# Altium PCB 宁波2号线PIS_数字功率放大器_网络音频(BHC-A-2030-02)_PCB(06001537)_V1.0.PcbDoc (part 2 of 7)
Units mm, origin at the board's own origin, x right, y up, seen from the top; angles counter-clockwise.
Board outline 86 x 96 mm, 4 copper layers (Top Layer, GND, VDD, Bottom Layer); 204 components, 185 nets, 781 pads, 267 vias.
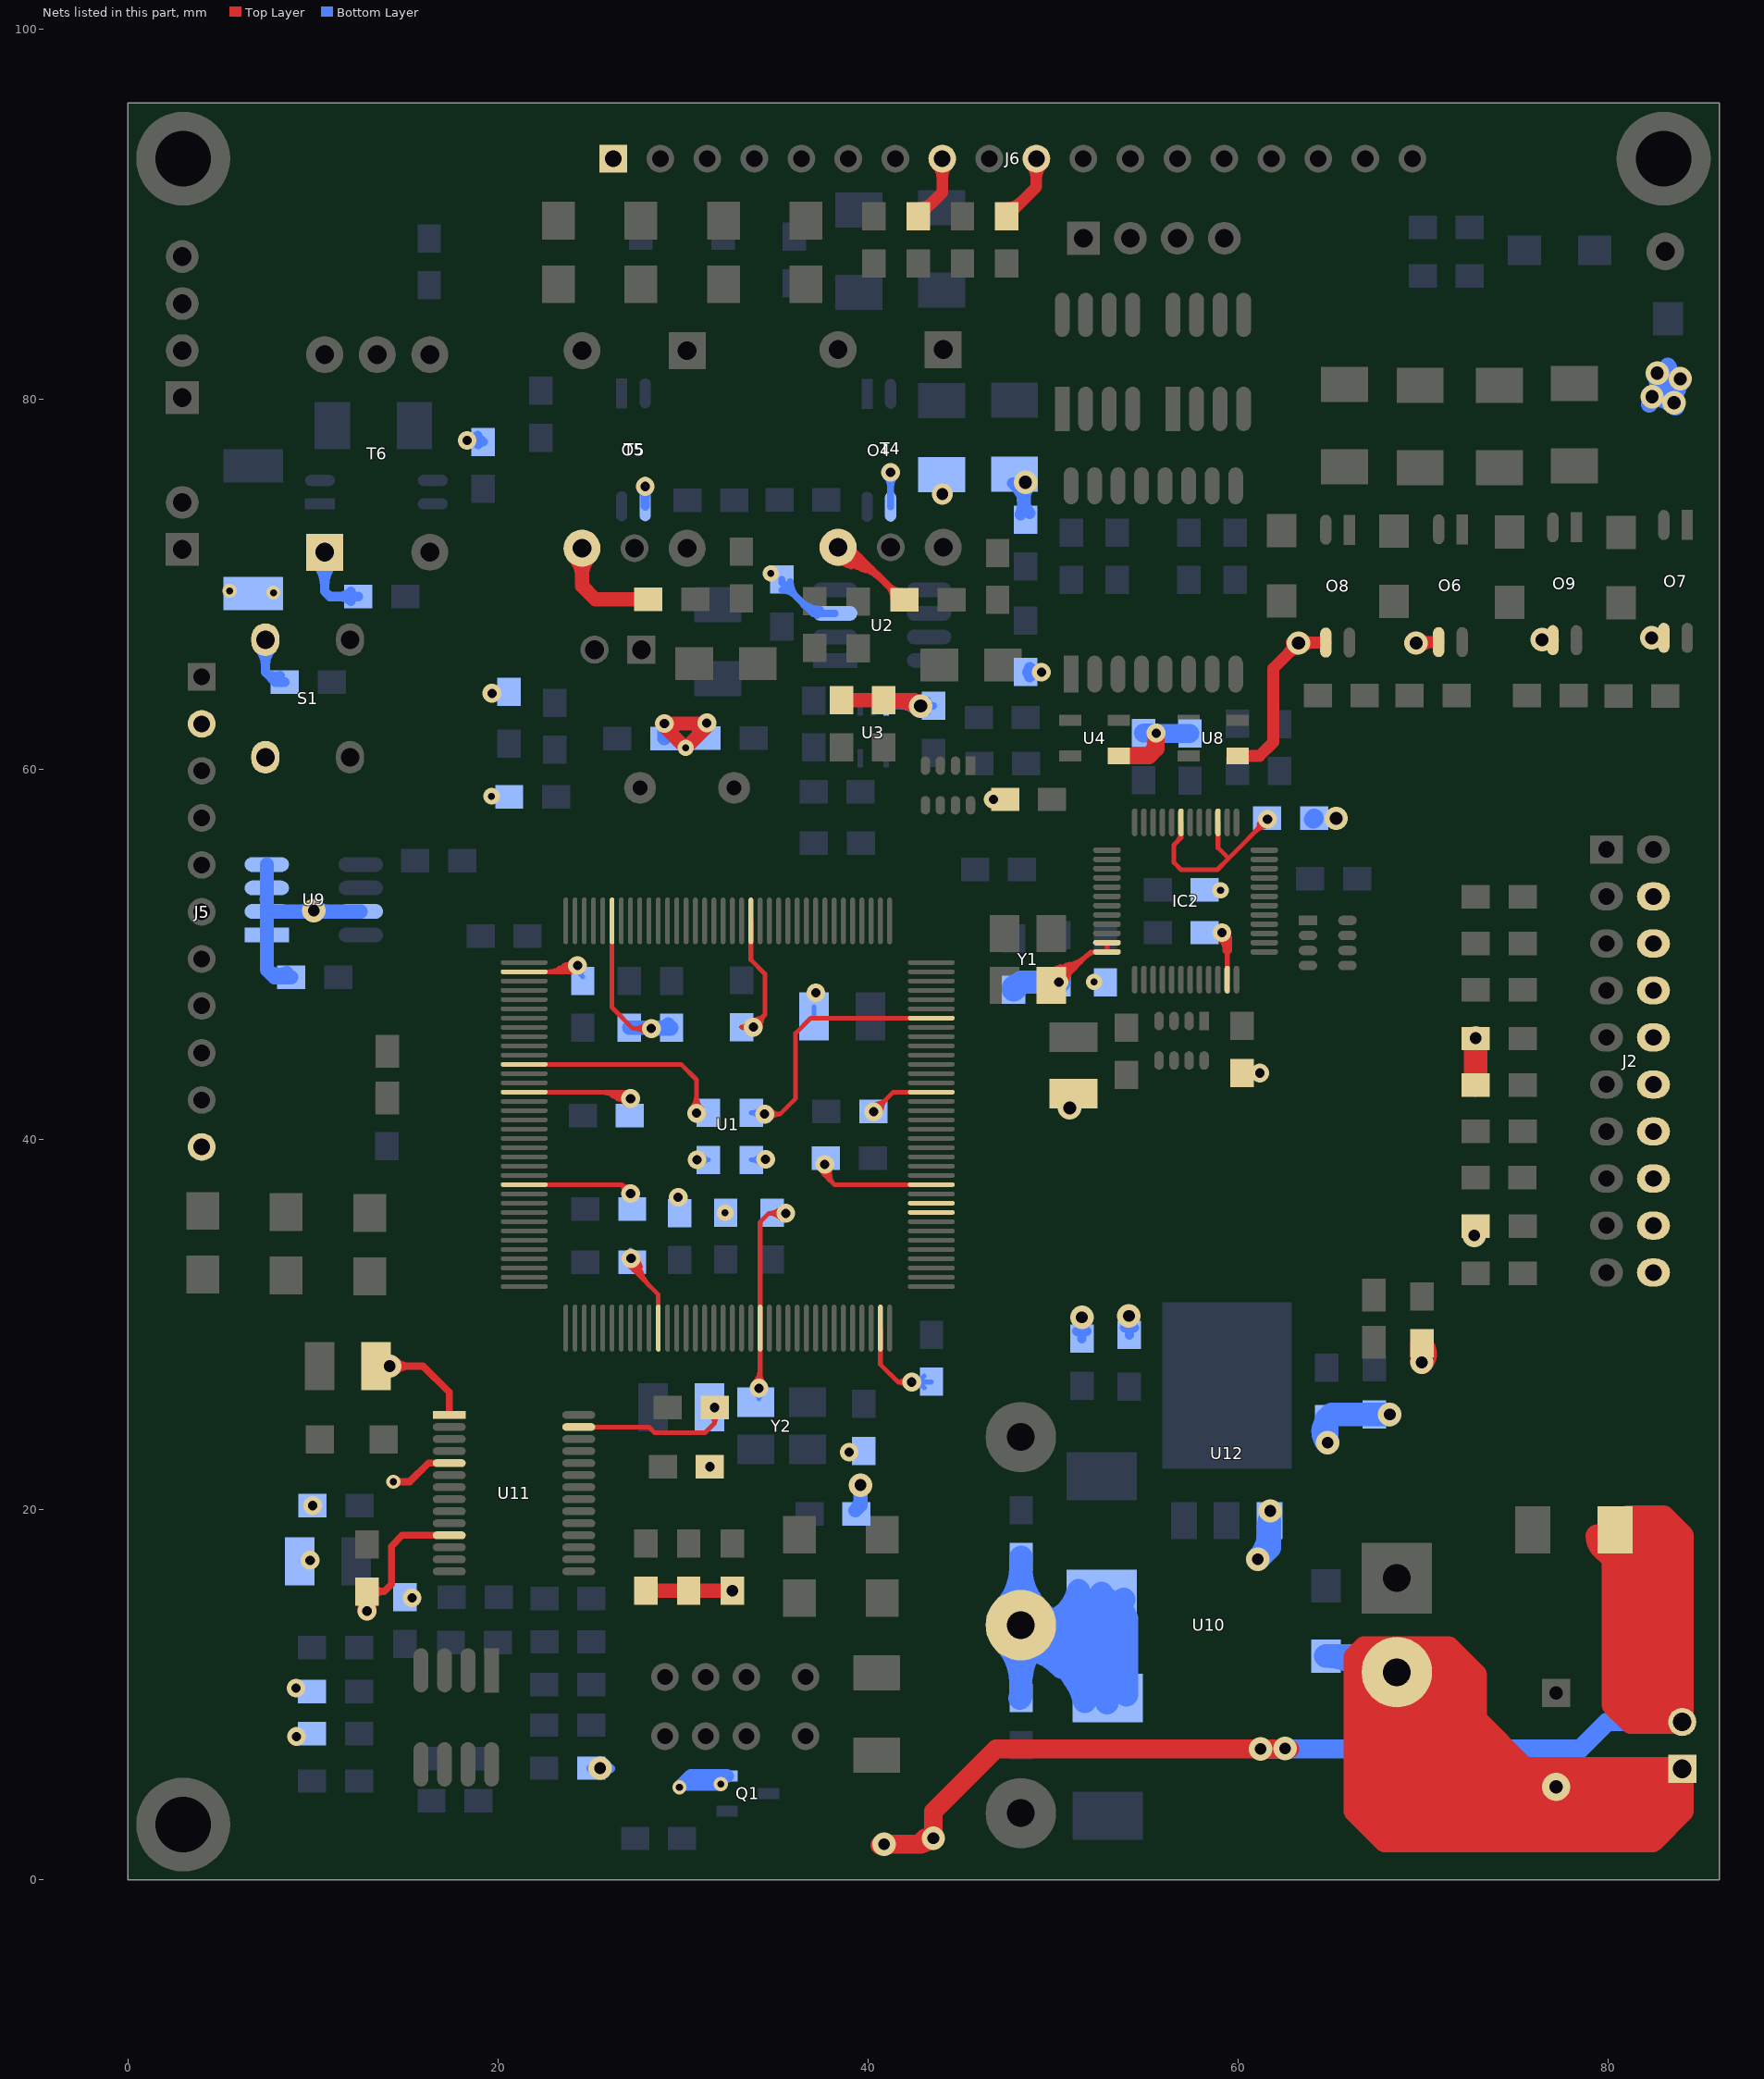
[diagram p4: the nets of this part, all layers, seen from the top]

## Via types
v1: diameter 1.016, hole 0.508, Top Layer to Bottom Layer, 122 vias
v2: diameter 0.762, hole 0.381, Top Layer to Bottom Layer, 48 vias
v3: diameter 0.889, hole 0.381, Top Layer to Bottom Layer, 37 vias
v4: diameter 1.27, hole 0.635, Top Layer to Bottom Layer, 28 vias
v5: diameter 1.27, hole 0.711, Top Layer to Bottom Layer, 20 vias
v6: diameter 0.762, hole 0.457, Top Layer to Bottom Layer, 11 vias
v7: diameter 1.143, hole 0.635, Top Layer to Bottom Layer, 1 vias

## Nets (pads, with @x,y where several pads share a name; then routed paths per layer and width w, separated by ;. In a path a pad name is that pad's centre, name@x,y a point inside that pad or via, vN(x,y) a via of type N, cw(c..) or ccw(c..) an arc to the next point about the centre after c; other vN are vias at no path point) (continued)
AGND1: C3.1 C7.2 C8.1 C9.2 C11.1 C13.1 C15.2 C16.1 C17.1 C18.1 C20.1 C21.2 C22.1 C23.1 C24.1 C26.1 C27.2 C29.2 C30.2 C31.1 C34.1 C35.2 C36.1 C37.1 C38.2 C39.1 C40.1 C41.1 C42.1 C43.1 C44.1 C45.2 C46.1 C47.1 C48.1 C49.1 C50.1 C51.1 C52.1 C53.1 C56.2 C57.1 C58.1 C62.1 C63.2 C65.2 C66.2 C67.1 C68.2 C69.2 C70.2 C71.2 C72.2 C74.2 C76.2 C77.2 C80.2 D10.A D13.A IC2.35 IC2.36 IC2.47 J2.4 J2.6 J2.8 J2.10 J2.12 J2.14 J2.16 J2.18 J2.20 J5.2 J5.11 J6.1 J6.8 J6.10 L2.2 O4.3 O5.3 O6.3 O7.3 O8.3 O9.3 Q1.2 R1.1 R9.2 R24.2 R29.1 R30.1 R31.1 R35.2 R40.2 R42.2 R76.1 R83.1 R85.1 R89.1 R94.1 R97.1 R105.1 S1.1 T4.5 T5.5 T6.1 U1.16 U1.31 U1.38 U1.51 U1.61 U1.83 U1.94 U1.107 U1.120 U1.130 U2.3 U3.3 U4.1 U8.1 U9.1 U9.2 U9.3 U9.4 U9.7 U10.4 U11.1 U11.5 U11.11 U11.27 U12.1 Y1.2 Y2.2 | length 734.8
  Top Layer w0.178: C9.2@60.222,43.596 cw(c60.222,42.712) 60.871,43.311 ccw(c60.222,42.712) C9.2@60.222,43.596 ; C9.2@60.222,43.596 ccw(c60.222,44.479) 60.871,43.88 cw(c60.222,44.479) C9.2@60.222,43.596 ; C9.2@60.222,43.596 v1(61.179,43.596) ; C9.2@60.628,43.596 cw(c60.628,43.087) 61.002,43.432 ccw(c60.628,43.087) C9.2@60.628,43.596 ; C9.2@60.628,43.596 ccw(c60.628,44.104) 61.002,43.759 cw(c60.628,44.104) C9.2@60.628,43.596 ; v1@60.868,43.596 cw(c60.868,43.977) 60.539,43.783 ccw(c60.868,43.977) v1@60.868,43.596 ; v1@60.868,43.596 ccw(c60.868,43.214) 60.539,43.408 cw(c60.868,43.214) v1@60.868,43.596 ; v1(61.179,43.596) cw(c61.179,44.161) 60.692,43.873 ccw(c61.179,44.161) v1(61.179,43.596) ; v1(61.179,43.596) ccw(c61.179,43.03) 60.692,43.318 cw(c61.179,43.03) v1(61.179,43.596)
  Top Layer w0.254: U1.61@21.423,37.566 26.696,37.566 ; U1.51@21.423,42.566 26.928,42.566 27.178,42.316 v1(27.178,42.215) ; U1.38@21.423,49.066 23.971,49.066 v1(24.308,49.403) ; 23.294,49.243 cw(c23.597,48.718) v1@24.034,49.139 ; 23.576,49.405 cw(c23.838,48.95) v1@24.216,49.315 ; 23.626,49.151 cw(c23.816,48.822) v1@24.062,49.112 ; 23.706,49.197 ccw(c23.456,49.631) v1@23.94,49.502 ; U11.27@24.374,24.471 28.158,24.471 28.473,24.155 31.191,24.155 31.715,24.68 ; 26.158,42.383 ccw(c26.469,42.915) v1@26.907,42.483 ; U1.31@26.173,51.816 26.173,47.131 27.305,45.999 v1(28.296,45.999) ; 26.441,42.218 ccw(c26.709,42.678) v1@27.088,42.304 ; 26.475,42.479 ccw(c26.683,42.84) v1@26.941,42.513 ; 26.577,42.42 cw(c26.326,41.987) v1@26.81,42.116 ; v1@27.14,33.469 cw(c26.358,32.115) 27.868,32.52 ; v1@27.156,33.461 cw(c26.971,33) 27.451,33.128 ; v1@27.178,33.122 28.673,31.626 U1.83@28.673,29.816 ; v1(27.178,37.084) 26.696,37.566 ; v1@27.267,33.689 cw(c26.792,32.866) 27.709,33.112 ; 27.483,33.008 cw(c27.967,33.138) v1@27.533,33.388 ; C76.2@31.463,25.241 cw(c30.966,24.68) 31.715,24.68 ; C76.2@31.477,25.077 cw(c31.265,24.68) 31.715,24.68 ; v1(31.715,25.526) 31.715,24.68 ; C76.2@31.954,25.077 ccw(c32.166,24.68) 31.715,24.68 ; C76.2@31.968,25.241 ccw(c32.464,24.68) 31.715,24.68 ; U1.16@33.673,51.816 33.673,49.715 34.442,48.946 34.442,46.761 ; v1@33.682,46.095 cw(c34.207,46.014) 34.069,46.527 ; v1@33.854,45.957 ccw(c33.613,46.572) 34.259,46.436 ; v1(34.112,26.568) 34.173,26.63 U1.94@34.173,29.816 34.173,35.545 34.646,36.017 ; v1(35.56,36.017) 34.646,36.017 ; v1(37.668,38.659) 37.668,38.075 ; v1@40.185,41.529 cw(c40.737,41.416) 40.591,41.96 ; v1(40.31,41.504) 41.372,42.566 U1.130@43.423,42.566 ; v1@40.335,41.379 ccw(c40.222,41.931) 40.766,41.785 ; U1.107@40.673,29.816 40.673,27.856 41.631,26.899 ; v1(42.367,26.899) 41.631,26.899 ; U1.120@43.423,37.566 38.177,37.566 ; v1(46.777,58.379) R35.2@47.414,58.379 ; Y1.2@49.599,48.678 cw(c50.697,48.18) 50.385,49.345 ; Y1.2@49.784,48.311 50.216,48.311 52.045,50.14 IC2.36@52.917,50.14 IC2.35@52.917,50.64 ; Y1.2@49.784,48.422 ccw(c49.784,49.732) Y1.2@50.711,48.806 ; Y1.2@49.784,48.676 ccw(c49.784,50.599) 51.144,49.239 ; Y1.2@49.784,48.93 ccw(c49.784,51.467) 51.578,49.673 ; Y1.2@49.784,49.184 ccw(c49.784,52.334) 52.011,50.106 ; Y1.2@49.818,48.206 ccw(c50.036,48.982) v1@50.784,48.68 ; Y1.2@49.83,48.573 cw(c51.33,47.893) 50.904,49.484 ; Y1.2@49.887,48.451 ccw(c50.114,49.256) 50.89,48.943 ; Y1.2@49.908,48.193 ccw(c49.916,49.103) 50.794,48.867 ; Y1.2@49.911,48.701 ccw(c49.911,50.38) 51.098,49.193 ; Y1.2@49.911,48.955 ccw(c49.911,51.247) 51.531,49.626 ; Y1.2@49.911,49.209 ccw(c49.911,52.114) 51.965,50.06 ; Y1.2@49.963,48.647 cw(c50.686,48.355) Y1.2@50.484,49.109 ; Y1.2@50.061,48.468 cw(c51.963,47.606) 51.423,49.623 ; Y1.2@50.068,48.485 cw(c51.124,48.138) 50.836,49.212 ; Y1.2@50.194,48.54 cw(c50.796,48.365) Y1.2@50.634,48.971 ; Y1.2@50.198,48.552 cw(c51.277,48.117) 50.976,49.241 ; Y1.2@50.248,49.119 ccw(c50.662,49.838) 50.877,49.036 ; Y1.2@50.279,48.884 ccw(c50.247,49.209) Y1.2@50.5,49.002 ; Y1.2@50.321,48.449 cw(c51.079,48.288) 50.878,49.036 ; Y1.2@50.321,48.632 ccw(c50.343,49.256) 50.922,49.022 ; Y1.2@50.328,48.5 cw(c50.798,48.459) Y1.2@50.676,48.915 ; Y1.2@50.33,48.379 ccw(c50.275,48.881) 50.763,48.75 ; Y1.2@50.356,48.884 ccw(c50.402,49.329) 50.794,49.112 ; Y1.2@50.442,48.485 cw(c51.016,48.395) 50.866,48.957 ; Y1.2@50.584,48.536 cw(c50.929,48.536) Y1.2@50.685,48.78 ; Y1.2@50.657,48.675 cw(c51.156,48.923) 50.725,49.277 ; Y1.2@50.683,48.61 cw(c51.164,48.747) 50.726,48.99 ; IC2.47@59.417,48.64 59.417,50.292 ; 26.696,37.566 cw(c26.4,37.27) 26.807,37.172 ccw(c26.4,37.27) 26.696,37.566 ; 26.696,37.566 ccw(c26.992,37.862) 27.09,37.455 cw(c26.992,37.862) 26.696,37.566 ; 27.376,45.999 cw(c27.376,45.08) 28.026,45.73 ccw(c27.376,45.08) 27.376,45.999 ; 27.376,45.999 ccw(c27.376,46.919) 28.026,46.269 cw(c27.376,46.919) 27.376,45.999 ; 33.172,46.076 cw(c33.172,45.737) 33.471,45.896 ccw(c33.172,45.737) 33.172,46.076 ; 33.172,46.076 ccw(c33.172,46.414) 33.471,46.255 cw(c33.172,46.414) 33.172,46.076 ; 33.172,46.076 33.757,46.076 34.442,46.761 ; 34.442,46.761 ccw(c35.06,46.144) 34.188,46.096 cw(c35.06,46.144) 34.442,46.761 ; 34.646,36.017 cw(c34.646,35.111) 35.289,35.749 ccw(c34.646,35.111) 34.646,36.017 ; 34.646,36.017 ccw(c34.646,36.924) 35.289,36.285 cw(c34.646,36.924) 34.646,36.017 ; 37.668,38.075 cw(c37.926,38.075) 37.822,38.31 ccw(c37.926,38.075) 37.668,38.075 ; 37.668,38.075 ccw(c37.411,38.075) 37.515,38.31 cw(c37.411,38.075) 37.668,38.075 ; 37.668,38.075 38.177,37.566 ; 38.177,37.566 cw(c38.759,38.148) 38.013,38.497 ccw(c38.759,38.148) 38.177,37.566 ; 40.96,42.154 cw(c40.31,42.804) 40.31,41.885 ccw(c40.31,42.804) 40.96,42.154 ; 40.96,42.154 ccw(c41.611,41.504) 40.691,41.504 cw(c41.611,41.504) 40.96,42.154 ; 41.631,26.899 cw(c41.631,26.377) 42.056,26.678 ccw(c41.631,26.377) 41.631,26.899 ; 41.631,26.899 ccw(c41.631,27.42) 42.056,27.119 cw(c41.631,27.42) 41.631,26.899 ; R35.2@47.414,58.379 cw(c47.414,58.719) 47.113,58.558 ccw(c47.414,58.719) R35.2@47.414,58.379 ; R35.2@47.414,58.379 ccw(c47.414,58.038) 47.113,58.199 cw(c47.414,58.038) R35.2@47.414,58.379 ; U1.38@22.574,49.066 ccw(c22.574,51.136) 24.038,49.672 cw(c22.574,51.136) U1.38@22.574,49.066 ; 23.188,49.066 ccw(c23.188,50.523) 24.218,49.493 cw(c23.188,50.523) 23.188,49.066 ; 23.801,49.066 ccw(c23.801,49.91) 24.398,49.313 cw(c23.801,49.91) 23.801,49.066 ; 25.41,42.566 cw(c25.41,40.447) 26.909,41.945 ccw(c25.41,40.447) 25.41,42.566 ; 26.024,42.566 cw(c26.024,41.06) 27.088,42.125 ccw(c26.024,41.06) 26.024,42.566 ; 26.637,42.566 cw(c26.637,41.674) 27.268,42.305 ccw(c26.637,41.674) 26.637,42.566 ; v1@27.076,33.579 ccw(c27.935,33.579) 27.328,32.972 cw(c27.935,33.579) v1@27.076,33.579 ; v1@27.33,33.579 ccw(c28.802,33.579) 27.761,32.538 cw(c28.802,33.579) v1@27.33,33.579 ; v1@27.584,33.579 ccw(c29.669,33.579) 28.195,32.105 cw(c29.669,33.579) v1@27.584,33.579 ; v1@33.807,46.457 ccw(c33.807,47.254) 34.371,46.69 cw(c33.807,47.254) v1@33.807,46.457 ; v1@33.843,26.838 ccw(c33.045,27.636) 34.173,27.636 cw(c33.045,27.636) v1@33.843,26.838 ; 34.173,27.34 ccw(c34.884,27.34) 34.382,26.838 cw(c34.884,27.34) 34.173,27.34 ; v1@37.553,38.713 ccw(c38.061,38.475) 37.665,38.078 cw(c38.061,38.475) v1@37.553,38.713 ; v1@37.783,38.605 ccw(c38.41,38.312) 37.921,37.822 cw(c38.41,38.312) v1@37.783,38.605 ; Y1.2@49.947,48.597 cw(c50.549,48.447) 50.338,49.031 ccw(c50.549,48.447) Y1.2@49.947,48.597 ; Y1.2@50.193,48.536 cw(c51.107,48.307) 50.787,49.193 ccw(c51.107,48.307) Y1.2@50.193,48.536 ; Y1.2@50.316,48.886 ccw(c50.316,50.032) 51.126,49.221 cw(c50.316,50.032) Y1.2@50.316,48.886 ; Y1.2@50.439,48.474 cw(c51.664,48.168) 51.235,49.355 ccw(c51.664,48.168) Y1.2@50.439,48.474 ; Y1.2@50.442,48.489 cw(c51.17,48.401) 50.794,49.03 ccw(c51.17,48.401) Y1.2@50.442,48.489 ; Y1.2@50.694,48.459 cw(c51.822,48.321) 51.239,49.296 ccw(c51.822,48.321) Y1.2@50.694,48.459 ; Y1.2@50.697,48.505 cw(c51.391,48.505) 50.9,48.995 ccw(c51.391,48.505) Y1.2@50.697,48.505 ; 51.813,49.908 cw(c52.317,49.403) 52.317,50.117 ccw(c52.317,49.403) 51.813,49.908
  Top Layer w0.381: C65.2@12.927,15.579 13.852,15.579 ; v2(14.351,21.514) 15.24,21.514 16.247,22.521 U11.5@17.374,22.521 ; U11.11@17.374,18.621 14.836,18.621 14.249,18.034 14.249,15.977 13.852,15.579 ; U11.1@17.374,25.121 17.374,26.34 15.951,27.762 C69.2@13.411,27.762 ; T4.5@38.085,71.859 ccw(c39.509,72.507) 39.104,70.996 ; T4.5@38.389,71.997 39.026,71.997 41.86,69.163 C3.1@41.937,69.163 ; T4.5@38.432,72.017 ccw(c40.461,72.94) 39.884,70.787 ; T4.5@38.794,71.296 cw(c39.064,70.827) 39.204,71.35 ; T4.5@38.801,72.115 ccw(c40.056,72.473) 39.718,71.212 ; v5@42.824,63.398 v5(42.85,63.424) ; C69.2@13.411,27.762 cw(c13.411,27.374) 13.755,27.555 ccw(c13.411,27.374) C69.2@13.411,27.762 ; C69.2@13.411,27.762 ccw(c13.411,28.15) 13.755,27.969 cw(c13.411,28.15) C69.2@13.411,27.762 ; 13.852,15.579 cw(c13.852,16.319) 13.275,15.857 ccw(c13.852,16.319) 13.852,15.579 ; 13.852,15.579 ccw(c13.852,14.84) 13.275,15.302 cw(c13.852,14.84) 13.852,15.579 ; 14.811,21.514 cw(c14.811,21.974) 14.486,21.649 ccw(c14.811,21.974) 14.811,21.514 ; 14.811,21.514 ccw(c14.811,21.054) 14.486,21.379 cw(c14.811,21.054) 14.811,21.514 ; 14.883,27.762 cw(c14.883,29.234) 13.842,28.193 ccw(c14.883,29.234) 14.883,27.762 ; 14.883,27.762 ccw(c14.883,26.291) 13.842,27.331 cw(c14.883,26.291) 14.883,27.762 ; 15.221,27.762 cw(c15.221,28.835) 14.462,28.077 ccw(c15.221,28.835) 15.221,27.762 ; 15.221,27.762 ccw(c15.221,26.689) 14.462,27.448 cw(c15.221,26.689) 15.221,27.762 ; T4.5@38.389,71.188 cw(c38.389,67.694) 40.859,70.164 ccw(c38.389,67.694) T4.5@38.389,71.188 ; T4.5@38.389,71.569 cw(c38.389,68.995) 40.209,70.815 ccw(c38.389,68.995) T4.5@38.389,71.569 ; T4.5@38.389,71.95 cw(c38.389,70.296) 39.558,71.465 ccw(c38.389,70.296) T4.5@38.389,71.95 ; 41.084,69.94 cw(c40.307,69.163) 41.406,69.163 ccw(c40.307,69.163) 41.084,69.94 ; 41.109,69.914 ccw(c41.85,70.656) 41.85,69.608 cw(c41.85,70.656) 41.109,69.914
  Top Layer w0.508: C26.1@42.716,90.382 ccw(c42.716,91.609) 43.583,90.742 ; C26.1@43.097,90.001 cw(c43.71,90.001) C26.1@43.277,90.435 ; v1(59.131,51.181) 59.417,50.895 59.417,50.292 ; v1@59.005,50.961 cw(c58.594,50.247) 59.417,50.247 ccw(c58.594,50.247) v1@59.005,50.961
  Top Layer w0.635: C26.1@42.716,89.874 44.02,91.178 J6.8@44.02,93 ; C26.1@42.716,90.319 ccw(c42.716,91.392) 43.475,90.633 ; J6.8@43.714,92.694 cw(c42.976,91.956) 44.02,91.956 cw(c45.064,91.956) J6.8@44.326,92.694 ; C23.1@47.497,89.874 49.1,91.478 J6.10@49.1,93 ; C23.1@47.497,90.319 ccw(c47.497,91.392) 48.256,90.633 ; J6.10@48.794,92.694 cw(c48.056,91.956) 49.1,91.956 cw(c50.144,91.956) J6.10@49.406,92.694 ; U8.1@59.969,60.731 61.163,60.731 61.9,61.468 61.9,65.456 v5(63.271,66.827) ; v5@62.89,66.853 O8.3@64.745,66.853 ; v5(69.621,66.827) 69.774,66.827 69.825,66.878 O6.3@70.841,66.878 ; O9.3@77.013,66.98 v5@76.454,66.98 ; v5(82.347,67.107) O7.3@83.007,67.107 ; 62.729,66.285 cw(c63.271,65.743) 63.271,66.51 ccw(c63.271,65.743) 62.729,66.285 ; 62.729,66.285 ccw(c62.187,66.827) 62.954,66.827 cw(c62.187,66.827) 62.729,66.285 ; v5(76.429,67.005) ccw(c76.745,67.321) 77.021,66.97 cw(c76.745,67.321) v5(76.429,67.005) ; v5(76.429,67.005) v5@76.454,66.98 ; v5@76.454,66.98 ccw(c76.743,67.268) 77.021,66.971 cw(c76.743,67.268) v5@76.454,66.98 ; O7.3@83.007,67.107 cw(c83.007,67.635) 82.595,67.305 ccw(c83.007,67.635) O7.3@83.007,67.107 ; O7.3@83.007,67.107 ccw(c83.007,66.579) 82.595,66.909 cw(c83.007,66.579) O7.3@83.007,67.107 ; v5@63.496,66.603 cw(c64.099,66) 64.099,66.853 ccw(c64.099,66) v5@63.496,66.603 ; v5@63.496,67.052 ccw(c63.977,67.533) 63.977,66.853 cw(c63.977,67.533) v5@63.496,67.052 ; v5@69.846,66.603 cw(c70.511,65.938) 70.511,66.878 ccw(c70.511,65.938) v5@69.846,66.603 ; v5@69.846,67.052 ccw(c70.265,67.471) 70.265,66.878 cw(c70.265,67.471) v5@69.846,67.052
  Top Layer w0.762: T5.5@24.546,71.946 24.546,69.917 25.274,69.188 C13.1@28.134,69.188 ; R89.1@28,15.629 R83.1@30.312,15.629 v4(32.674,15.629) ; R24.2@38.567,63.737 R9.2@40.853,63.737 42.537,63.737 v5(42.85,63.424) ; R9.2@41.029,63.428 cw(c41.624,62.815) 41.845,63.639 ; C3.1@41.937,69.163 C3.1@41.977,69.163 ; 42.039,63.609 ccw(c42.353,64.153) v5@42.707,63.634 ; 24.546,70.452 cw(c26.04,70.452) 24.984,71.509 ccw(c26.04,70.452) 24.546,70.452 ; 24.546,70.452 ccw(c23.052,70.452) 24.108,71.509 cw(c23.052,70.452) 24.546,70.452 ; v1@28.998,62.315 v3(30.15,61.163) 31.293,62.306 v1(31.293,62.509) 31.258,62.475 v1(28.998,62.475) v1@28.998,62.315 ; v1@29.125,62.475 ccw(c29.816,62.475) 29.327,61.986 cw(c29.816,62.475) v1@29.125,62.475 ; 30.932,61.946 ccw(c30.369,62.509) 31.166,62.509 cw(c30.369,62.509) 30.932,61.946 ; R9.2@41.481,63.737 cw(c41.481,62.055) 42.67,63.244 ccw(c41.481,62.055) R9.2@41.481,63.737
  Top Layer w0.889: U4.1@53.569,60.731 55.194,60.731 ; v1(55.575,61.96) 55.575,61.112 55.194,60.731 ; 55.194,60.731 ccw(c54.314,61.612) 55.514,61.943 cw(c54.314,61.612) 55.194,60.731
  Top Layer w1.016: C65.2@12.927,15.579 12.929,15.578 v1(12.929,14.529) ; C15.2@50.876,42.545 50.876,41.707 50.902,41.681 v5(50.902,41.707) ; v5@50.902,41.656 cw(c51.566,41.656) C15.2@51.246,42.238
  Top Layer w1.27: R1.1@69.936,28.863 cw(c69.473,28.419) v4(69.926,27.965) 69.936,27.975 R1.1@69.936,28.99 ; R30.1@72.839,42.946 R29.1@72.839,45.457 v4(72.839,45.483)
  Bottom Layer w0.254: C40.1@24.359,49.022 C40.1@24.588,48.792 ; C48.1@27.136,33.349 27.136,33.994 v1@27.178,34.036 ; v1(30.759,38.913) v1@30.607,38.913 ; C43.1@33.171,46.074 C43.1@33.172,46.076 ; R40.2@33.69,38.905 v1@34.434,38.905 ; v1(34.112,26.568) Y2.2@34.112,25.984 ; v1(34.468,38.938) v1@34.434,38.905 ; C38.2@37.084,46.66 C38.2@37.084,47.168 ; v1(37.668,38.659) C52.1@37.735,38.726 ; C44.1@40.294,41.52 v1(40.31,41.504) ; C51.1@43.433,26.915 43.417,26.899 v1(42.367,26.899) ; C40.1@24.588,48.792 cw(c24.765,48.969) 24.584,49.141 ccw(c24.765,48.969) C40.1@24.588,48.792 ; v1@27.178,34.011 cw(c27.043,34.011) 27.063,33.877 ccw(c27.043,34.011) v1@27.178,34.011 ; v1@27.178,34.011 ccw(c27.337,34.011) 27.289,33.859 cw(c27.337,34.011) v1@27.178,34.011 ; v1@27.178,34.011 v1@27.178,34.036 ; v1@27.178,34.036 cw(c27.013,34.036) 27.043,33.874 ccw(c27.013,34.036) v1@27.178,34.036 ; v1@27.178,34.036 ccw(c27.372,34.036) 27.307,33.853 cw(c27.372,34.036) v1@27.178,34.036 ; v1@30.607,38.913 cw(c30.607,38.586) 30.909,38.711 ccw(c30.607,38.586) v1@30.607,38.913 ; v1@30.607,38.913 ccw(c30.607,39.25) 30.915,39.112 cw(c30.607,39.25) v1@30.607,38.913 ; v1@30.607,38.913 v1@30.615,38.905 ; v1@30.615,38.905 cw(c30.615,38.585) 30.91,38.709 ccw(c30.615,38.585) v1@30.615,38.905 ; v1@30.615,38.905 ccw(c30.615,39.224) 30.91,39.101 cw(c30.615,39.224) v1@30.615,38.905 ; v1@30.615,38.905 R42.2@31.378,38.905 ; R42.2@31.378,38.905 cw(c31.378,39.21) 31.103,39.078 ccw(c31.378,39.21) R42.2@31.378,38.905 ; R42.2@31.378,38.905 ccw(c31.378,38.585) 31.096,38.735 cw(c31.378,38.585) R42.2@31.378,38.905 ; R40.2@33.69,38.905 cw(c33.69,38.241) 34.184,38.684 ccw(c33.69,38.241) R40.2@33.69,38.905 ; R40.2@33.69,38.905 ccw(c33.69,39.461) 34.152,39.151 cw(c33.69,39.461) R40.2@33.69,38.905 ; Y2.2@34.112,25.984 cw(c34.37,25.984) 34.266,26.22 ccw(c34.37,25.984) Y2.2@34.112,25.984 ; Y2.2@34.112,25.984 ccw(c33.855,25.984) 33.959,26.22 cw(c33.855,25.984) Y2.2@34.112,25.984 ; v1@34.434,38.905 cw(c34.434,39.196) 34.163,39.09 ccw(c34.434,39.196) v1@34.434,38.905 ; v1@34.434,38.905 ccw(c34.434,38.613) 34.163,38.719 cw(c34.434,38.613) v1@34.434,38.905 ; v1(42.367,26.899) cw(c42.367,26.006) 43.046,26.585 ccw(c42.367,26.006) v1(42.367,26.899) ; v1(42.367,26.899) ccw(c42.367,27.736) 43.03,27.225 cw(c42.367,27.736) v1(42.367,26.899) ; C51.1@43.287,26.899 cw(c43.287,27.818) 42.637,27.168 ccw(c43.287,27.818) C51.1@43.287,26.899 ; C51.1@43.287,26.899 ccw(c43.287,25.979) 42.637,26.629 cw(c43.287,25.979) C51.1@43.287,26.899
  Bottom Layer w0.381: v2@29.769,5.029 29.779,5.039 v2(29.815,5.004) ; C24.1@35.358,70.266 35.358,70.103 37.033,68.428 U2.3@38.227,68.428 ; 36.519,68.88 cw(c36.209,67.725) U2.3@37.246,68.323 ; U3.3@41.008,63.433 C22.1@43.537,63.433 ; O4.3@41.224,74.193 v1(41.224,76.048) ; v2(29.815,5.004) 31.877,5.004 v2@32.05,5.177 ; v2(29.815,5.004) 29.987,5.177 31.166,5.177 ; 31.166,5.177 31.613,5.624 v2(32.055,5.182) v2@32.05,5.177 ; 31.166,5.177 v2@32.05,5.177 ; 41.224,75.281 cw(c41.991,75.281) 41.449,75.823 ccw(c41.991,75.281) 41.224,75.281 ; 41.224,75.281 ccw(c40.458,75.281) 41,75.823 cw(c40.458,75.281) 41.224,75.281 ; v5@42.464,63.433 cw(c42.464,62.36) 43.222,63.119 ccw(c42.464,62.36) v5@42.464,63.433 ; v5@42.464,63.433 ccw(c42.464,64.506) 43.222,63.747 cw(c42.464,64.506) v5@42.464,63.433 ; v5(42.85,63.424) cw(c42.85,63.109) 43.135,63.243 ccw(c42.85,63.109) v5(42.85,63.424) ; v5(42.85,63.424) ccw(c42.85,63.726) 43.128,63.608 cw(c42.85,63.726) v5(42.85,63.424) ; v5(42.85,63.424) C22.1@43.528,63.424 ; C22.1@43.528,63.424 cw(c43.528,63.718) 43.257,63.601 ccw(c43.528,63.718) C22.1@43.528,63.424 ; C22.1@43.528,63.424 ccw(c43.528,63.129) 43.257,63.247 cw(c43.528,63.129) C22.1@43.528,63.424 ; C22.1@43.528,63.424 C22.1@43.537,63.433 ; C22.1@43.537,63.433 cw(c43.537,63.748) 43.252,63.614 ccw(c43.537,63.748) C22.1@43.537,63.433 ; C22.1@43.537,63.433 ccw(c43.537,63.131) 43.259,63.249 cw(c43.537,63.131) C22.1@43.537,63.433 ; C24.1@35.358,69.694 cw(c35.358,68.707) 36.056,69.405 ccw(c35.358,68.707) C24.1@35.358,69.694 ; C24.1@35.802,70.139 ccw(c36.962,70.139) 36.142,69.319 cw(c36.962,70.139) C24.1@35.802,70.139 ; 36.397,69.064 ccw(c37.427,70.094) 37.427,68.637 cw(c37.427,70.094) 36.397,69.064 ; 41.755,63.433 cw(c41.755,62.329) 42.535,63.109 ccw(c41.755,62.329) 41.755,63.433 ; 41.799,63.433 ccw(c41.799,64.475) 42.535,63.738 cw(c41.799,64.475) 41.799,63.433
  Bottom Layer w0.508: S1.1@7.442,67.005 7.442,65.253 ; C21.2@8.493,64.718 7.977,64.718 7.442,65.253 ; T6.1@10.643,71.73 10.643,69.621 10.923,69.341 C80.2@12.455,69.341 ; v1@18.395,77.775 cw(c18.395,77) R97.1@18.942,77.548 ; v1@18.518,77.595 cw(c18.952,77.162) 18.952,77.775 cw(c18.952,78.388) v1@18.518,77.954 ; R97.1@18.913,78.053 cw(c18.339,78.505) v1(18.339,77.775) 19.127,77.775 R97.1@19.212,77.69 ; C57.1@25.053,6.044 v4@26.062,6.044 ; v4@26.086,6.02 v4@26.062,6.044 ; O5.3@27.965,74.219 v1@27.965,75.565 ; U10.4@48.26,13.767 48.284,13.743 C63.2@48.284,9.821 ; C72.2@51.561,29.252 v4(51.562,30.404) v4(51.562,30.404) ; v4(54.102,30.48) v4@54.127,30.455 ; C70.2@54.127,29.439 v4@54.127,30.455 ; 7.442,65.253 ccw(c7.978,65.788) 8.236,65.076 cw(c7.978,65.788) 7.442,65.253 ; 7.442,65.652 cw(c8.669,65.652) 7.801,66.519 ccw(c8.669,65.652) 7.442,65.652 ; 7.442,65.652 ccw(c6.216,65.652) 7.083,66.519 cw(c6.216,65.652) 7.442,65.652 ; 10.643,69.929 cw(c12.444,69.929) 11.17,71.202 ccw(c12.444,69.929) 10.643,69.929 ; 10.643,69.929 ccw(c8.842,69.929) 10.115,71.202 cw(c8.842,69.929) 10.643,69.929 ; 11.408,69.341 cw(c11.408,68.421) 12.059,69.071 ccw(c11.408,68.421) 11.408,69.341 ; 11.408,69.341 ccw(c11.408,70.261) 12.059,69.61 cw(c11.408,70.261) 11.408,69.341 ; v4@26.062,6.044 cw(c26.062,6.874) 25.457,6.305 ccw(c26.062,6.874) v4@26.062,6.044 ; v4@26.062,6.044 ccw(c26.062,5.214) 25.457,5.783 cw(c26.062,5.214) v4@26.062,6.044 ; O5.3@27.965,74.672 cw(c28.579,74.672) 28.145,75.106 ccw(c28.579,74.672) O5.3@27.965,74.672 ; O5.3@27.965,74.672 ccw(c27.352,74.672) 27.786,75.106 cw(c27.352,74.672) O5.3@27.965,74.672 ; C63.2@47.954,10.138 ccw(c47.255,10.542) 48.035,10.751 ; C63.2@47.954,10.138 ccw(c47.255,10.542) 48.035,10.751 ; C63.2@47.954,10.138 ccw(c47.255,10.542) 48.035,10.751 ; 47.994,10.904 ccw(c48.991,11.171) C63.2@48.475,10.278 ; 47.994,10.904 ccw(c48.991,11.171) C63.2@48.475,10.278 ; 47.994,10.904 ccw(c48.991,11.171) C63.2@48.475,10.278 ; C63.2@48.094,10.278 ccw(c47.586,11.157) 48.567,10.894 ; C63.2@48.094,10.278 ccw(c47.586,11.157) 48.567,10.894 ; C63.2@48.094,10.278 ccw(c47.586,11.157) 48.567,10.894 ; C63.2@48.284,9.821 ccw(c44.45,9.821) 47.113,12.579 cw(c44.45,9.821) C63.2@48.284,9.821 ; 48.284,10.867 cw(c47.364,10.867) 48.015,10.217 ccw(c47.364,10.867) 48.284,10.867 ; 48.284,10.867 ccw(c49.204,10.867) 48.554,10.217 cw(c49.204,10.867) 48.284,10.867 ; 48.532,10.764 ccw(c49.328,10.55) C63.2@48.614,10.138 ; 48.532,10.764 ccw(c49.328,10.55) C63.2@48.614,10.138 ; 48.532,10.764 ccw(c49.328,10.55) C63.2@48.614,10.138 ; v4@51.561,30.298 cw(c50.641,30.298) 51.291,29.648 ccw(c50.641,30.298) v4@51.561,30.298 ; v4@51.561,30.298 ccw(c52.481,30.298) 51.83,29.648 cw(c52.481,30.298) v4@51.561,30.298 ; v4@54.127,30.455 cw(c53.281,30.455) 53.865,29.842 ccw(c53.281,30.455) v4@54.127,30.455 ; v4@54.127,30.455 ccw(c54.974,30.455) 54.39,29.842 cw(c54.974,30.455) v4@54.127,30.455 ; C57.1@25.108,6.044 cw(c25.108,5.042) 25.816,5.75 ccw(c25.108,5.042) C57.1@25.108,6.044 ; C57.1@25.224,6.044 ccw(c25.224,6.881) 25.816,6.289 cw(c25.224,6.881) C57.1@25.224,6.044 ; U10.4@47.466,12.945 cw(c45.605,11.017) 48.284,11.017 ccw(c45.605,11.017) U10.4@47.466,12.945 ; C63.2@48.284,9.839 cw(c52.187,9.839) 49.427,12.599 ccw(c52.187,9.839) C63.2@48.284,9.839 ; 48.284,11.066 cw(c50.961,11.066) 49.068,12.959 ccw(c50.961,11.066) 48.284,11.066 ; v4@51.293,30.134 cw(c50.645,29.487) 51.561,29.487 ccw(c50.645,29.487) v4@51.293,30.134 ; C72.2@51.561,29.481 cw(c52.485,29.481) 51.831,30.134 ccw(c52.485,29.481) C72.2@51.561,29.481 ; v4@53.833,30.211 cw(c53.121,29.499) 54.127,29.499 ccw(c53.121,29.499) v4@53.833,30.211 ; C70.2@54.127,29.622 cw(c54.96,29.622) 54.371,30.211 ccw(c54.96,29.622) C70.2@54.127,29.622
  Bottom Layer w0.635: C31.1@48.24,73.777 ccw(c47.332,74.302) 48.345,74.573 ; C31.1@48.49,74.05 48.49,75.49 v5(48.514,75.514) ; C30.2@48.641,65.253 v1(49.378,65.253) ; v1@49.281,65.253 cw(c49.281,66.019) 48.739,65.477 ccw(c49.281,66.019) v1@49.281,65.253 ; v1@49.281,65.253 ccw(c49.281,64.486) 48.739,65.028 cw(c49.281,64.486) v1@49.281,65.253 ; D13.A@47.824,75.468 cw(c46.611,74.033) 48.49,74.033 ccw(c46.611,74.033) D13.A@47.824,75.468 ; D13.A@48.289,75.29 cw(c47.806,74.806) 48.49,74.806 ccw(c47.806,74.806) D13.A@48.289,75.29 ; C31.1@48.291,73.843 ccw(c47.81,74.324) 48.49,74.324 cw(c47.81,74.324) C31.1@48.291,73.843 ; 48.49,74.446 ccw(c49.343,74.446) 48.74,73.843 cw(c49.343,74.446) 48.49,74.446 ; 48.49,74.689 cw(c49.339,74.689) 48.739,75.29 ccw(c49.339,74.689) 48.49,74.689
  Bottom Layer w0.762: 7.493,52.984 7.518,52.984 ; U9.4@7.518,54.864 U9.3@7.518,53.594 7.518,52.984 ; C53.1@8.83,48.769 7.924,48.769 7.518,49.174 ; U9.7@12.598,52.324 U9.2@7.518,52.324 ; C42.1@27.101,46.041 C41.1@29.387,46.041 29.345,45.999 v1(28.296,45.999) ; C29.2@28.998,61.672 v1(28.998,62.475) v1@29.032,62.509 ; v2@29.987,5.177 30.434,5.624 31.613,5.624 Q1.2@32.378,5.624 ; C34.1@39.599,20.254 v4(39.599,21.336) ; 7.518,49.174 ccw(c8.178,49.834) 8.591,48.997 cw(c8.178,49.834) 7.518,49.174 ; 7.518,49.174 U9.1@7.518,51.054 U9.2@7.518,52.324 ; U9.2@7.518,52.324 7.518,52.984 ; v1@28.359,46.109 ccw(c28.679,46.664) C41.1@28.845,46.045 ; v1@28.359,46.109 ccw(c28.679,46.664) C41.1@28.845,46.045 ; v1@28.359,46.109 ccw(c28.679,46.664) C41.1@28.845,46.045 ; 9.323,52.324 ccw(c9.323,53.111) 9.879,52.554 cw(c9.323,53.111) 9.323,52.324 ; v4@10.238,52.554 ccw(c10.794,53.111) 10.794,52.324 cw(c10.794,53.111) v4@10.238,52.554 ; v1@28.673,45.999 ccw(c28.673,46.755) 29.207,46.221 cw(c28.673,46.755) v1@28.673,45.999 ; C34.1@39.327,19.965 ccw(c38.67,20.622) 39.599,20.622 cw(c38.67,20.622) C34.1@39.327,19.965
  Bottom Layer w0.889: v5@82.227,79.708 cw(c82.953,79.288) C35.2@83.152,80.103 ; v5@82.362,80.085 cw(c82.396,78.582) C35.2@83.434,79.669 ; v5(82.372,80.137) v5@82.372,79.959 ; C35.2@82.901,80.061 ccw(c83.27,80.57) C35.2@83.497,79.984 ; C35.2@83.127,80.714 ccw(c82.523,81.319) 83.227,81.803 ; C35.2@83.591,80.548 v5@83.591,79.629 ; v5@83.668,79.578 v5@83.642,79.578 ; C35.2@83.696,80.387 ccw(c83.099,80.731) C35.2@83.724,81.022 ; v5@82.372,79.959 ccw(c81.629,80.703) 82.495,81.299 cw(c81.629,80.703) v5@82.372,79.959 ; v5@82.372,79.959 cw(c82.862,79.47) 83.109,80.116 ccw(c82.862,79.47) v5@82.372,79.959 ; v5@82.372,79.959 C35.2@82.961,80.548 ; C35.2@82.509,80.179 cw(c82.37,78.836) C35.2@83.418,79.687 ; C35.2@82.509,80.179 cw(c82.37,78.836) C35.2@83.418,79.687 ; C35.2@82.509,80.179 cw(c82.37,78.836) C35.2@83.418,79.687 ; C35.2@82.961,80.548 ccw(c82.961,81.317) 83.711,81.145 cw(c82.961,81.317) C35.2@82.961,80.548 ; C35.2@82.961,80.548 C35.2@83.236,80.548 ; C35.2@83.236,80.548 ccw(c83.236,79.818) 82.551,80.071 cw(c83.236,79.818) C35.2@83.236,80.548 ; C35.2@83.418,79.687 ccw(c82.753,79.147) 82.842,79.999 cw(c82.753,79.147) C35.2@83.418,79.687 ; v5@83.591,79.629 cw(c83.939,79.976) 83.531,80.25 ccw(c83.939,79.976) v5@83.591,79.629 ; v5@83.591,79.629 v5@83.642,79.578 ; v5@83.642,79.578 cw(c84.054,79.99) 83.546,80.275 ccw(c84.054,79.99) v5@83.642,79.578 ; C35.2@82.45,79.963 cw(c82.76,79.27) 83.031,79.979 ccw(c82.76,79.27) C35.2@82.45,79.963 ; C35.2@82.537,80.042 cw(c83.66,79.394) 83.324,80.646 ccw(c83.66,79.394) C35.2@82.537,80.042 ; C35.2@83.156,80.102 cw(c83.03,79.555) 83.591,79.555 ccw(c83.03,79.555) C35.2@83.156,80.102 ; C35.2@83.591,79.906 cw(c85.092,79.906) 84.031,80.967 ccw(c85.092,79.906) C35.2@83.591,79.906
  Bottom Layer w1.016: v5@50.851,41.758 v5(50.902,41.707) ; C16.1@54.891,61.96 v1(55.575,61.96) ; v1@55.575,61.934 C17.1@57.405,61.934 ; L2.2@64.059,57.304 L2.2@64.118,57.363
  Bottom Layer w1.27: C7.2@47.879,48.082 48.302,48.505 v1(50.316,48.505) ; C7.2@47.879,48.209 cw(c48.593,47.496) 48.593,48.505 ; C63.2@48.209,9.83 48.26,9.881 U10.4@48.26,13.767 ; C58.1@48.284,17.441 48.26,17.416 U10.4@48.26,13.767 ; U10.4@49.53,13.767 ccw(c52.75,13.767) 50.473,11.49 ; 50.312,11.947 cw(c51.105,14.908) U10.4@48.26,13.767 ; 50.319,11.644 ccw(c48.26,9.585) U10.4@48.26,12.497 ; 50.453,11.847 ccw(c52.857,13.235) C62.1@52.455,10.488 ; 53.648,13.458 cw(c54.899,14.18) C56.2@53.755,15.062 ; 53.686,11.335 ccw(c54.296,10.983) C62.1@53.917,10.39 ; C62.1@53.975,10.008 53.975,14.122 ; U12.1@61.632,19.095 cw(c59.619,18.766) v4(61.062,17.323) ; U12.1@61.697,18.856 cw(c59.529,18.856) v4(61.062,17.323) ; U12.1@61.697,19.406 61.697,17.958 v4(61.062,17.323) ; C74.2@64.795,24.765 ccw(c65.445,24.221) v4(64.846,23.622) 64.795,23.673 C74.2@64.795,24.892 65.059,25.155 C71.2@67.362,25.155 ; C71.2@66.819,25.146 v4(68.199,25.146) v4@68.172,25.119 ; v4(72.839,45.483) v4@72.847,45.491 ; 48.26,10.701 cw(c51.326,10.701) 49.158,12.869 ccw(c51.326,10.701) 48.26,10.701 ; 48.26,10.701 ccw(c45.194,10.701) 47.362,12.869 cw(c45.194,10.701) 48.26,10.701 ; U10.4@48.26,12.497 cw(c48.26,7.591) 51.729,11.06 ccw(c48.26,7.591) U10.4@48.26,12.497 ; U10.4@48.26,13.767 U10.4@49.022,13.767 ; C58.1@48.26,16.833 cw(c45.194,16.833) 47.362,14.665 ccw(c45.194,16.833) C58.1@48.26,16.833 ; C58.1@48.26,16.833 ccw(c51.326,16.833) 49.158,14.665 cw(c51.326,16.833) C58.1@48.26,16.833 ; U10.4@49.022,13.767 ccw(c49.022,16.195) 51.382,15.625 cw(c49.022,16.195) U10.4@49.022,13.767 ; U10.4@49.022,13.767 C62.1@52.629,10.16 ; U10.4@49.022,13.767 50.927,13.767 ; 49.775,12.188 cw(c47.692,8.579) C62.1@51.717,9.658 ; 49.775,12.188 cw(c47.692,8.579) C62.1@51.717,9.658 ; 49.775,12.188 cw(c47.692,8.579) C62.1@51.717,9.658 ; 50.622,12.979 cw(c50.622,14.094) 49.518,13.941 ccw(c50.622,14.094) 50.622,12.979 ; 50.622,12.979 51.206,12.979 ; 50.927,13.767 ccw(c49.737,14.957) 51.38,15.324 cw(c49.737,14.957) 50.927,13.767 ; 50.927,13.767 cw(c50.927,15.932) 49.246,14.567 ccw(c50.927,15.932) 50.927,13.767 ; 50.927,13.767 ccw(c50.927,11.602) 49.246,12.966 cw(c50.927,11.602) 50.927,13.767 ; 50.927,13.767 51.613,13.767 52.629,12.751 ; 50.927,13.767 C56.2@52.629,15.469 52.629,12.751 ; 51.206,12.979 cw(c49.367,11.14) 51.75,10.097 ccw(c49.367,11.14) 51.206,12.979 ; 51.206,12.979 cw(c51.206,14.848) 49.452,14.204 ccw(c51.206,14.848) 51.206,12.979 ; 51.206,12.979 52.629,11.557 ; C62.1@51.995,10.387 ccw(c51.231,11.557) 52.629,11.557 ; C62.1@51.995,10.387 ccw(c51.231,11.557) 52.629,11.557 ; C62.1@51.995,10.387 ccw(c51.231,11.557) 52.629,11.557 ; C62.1@51.995,10.387 ccw(c51.231,11.557) 52.629,11.557 ; C62.1@52.629,10.16 52.629,11.557 ; C62.1@52.629,10.16 C62.1@52.959,9.83 52.959,15.138 53.975,14.122 ; 52.629,11.557 52.629,12.751 ; 52.629,13.863 cw(c54.234,13.863) 53.099,14.998 ccw(c54.234,13.863) 52.629,13.863 ; 52.629,13.863 ccw(c51.023,13.863) 52.159,14.998 cw(c51.023,13.863) 52.629,13.863 ; 52.959,11.435 cw(c51.354,11.435) 52.489,10.3 ccw(c51.354,11.435) 52.959,11.435 ; 52.959,11.435 ccw(c54.564,11.435) 53.429,10.3 cw(c54.564,11.435) 52.959,11.435 ; 53.975,14.122 cw(c54.6,14.748) 53.817,15.159 ccw(c54.6,14.748) 53.975,14.122 ; 50.635,13.767 ccw(c50.635,15.805) 52.617,15.327 cw(c50.635,15.805) 50.635,13.767 ; 50.8,11.989 cw(c48.64,9.83) 51.694,9.83 ccw(c48.64,9.83) 50.8,11.989 ; C62.1@51.889,10.3 ccw(c50.102,12.087) 52.629,12.087 cw(c50.102,12.087) C62.1@51.889,10.3 ; 52.522,11.664 cw(c51.196,10.339) 52.913,9.587 ccw(c51.196,10.339) 52.522,11.664 ; C56.2@52.759,14.998 cw(c49.822,12.062) 53.975,12.062 ccw(c49.822,12.062) C56.2@52.759,14.998 ; 52.959,13.212 cw(c55.486,13.212) 53.699,14.998 ccw(c55.486,13.212) 52.959,13.212 ; C62.1@53.089,10.3 ccw(c50.949,12.44) 53.975,12.44 cw(c50.949,12.44) C62.1@53.089,10.3 ; C56.2@53.171,14.806 cw(c53.095,13.929) 53.975,13.929 ccw(c53.095,13.929) C56.2@53.171,14.806
  other v1: 9.119,7.747 9.093,10.363 15.367,15.24 9.855,17.272 9.99,20.228 31.461,22.325 38.989,23.114 27.203,33.579 29.743,36.881 33.807,46.076 37.186,47.93 19.685,64.11 27.965,75.286
  other v3: 32.283,36.043 52.222,48.514 59.055,53.467 19.66,58.547 34.747,70.587
  other v4: 25.527,6.045 61.747,19.939 14.148,27.762 72.771,34.823 10.058,52.375
  other v5: 65.303,57.353 83.566,79.807 83.896,81.102 82.652,81.407
  other v7: 44.018,74.879
AGND2: IC2.15 IC2.19 L2.1 | length 16
  Top Layer w0.254: IC2.19@56.917,57.14 56.917,56.308 56.54,55.931 56.54,54.966 56.921,54.585 58.877,54.585 59.487,55.194 ; IC2.15@58.917,57.14 58.917,55.764 59.487,55.194 ; 61.139,57.021 cw(c61.682,56.875) v1@61.57,57.427 ; 61.314,56.846 ccw(c61.168,57.39) v1@61.719,57.277 ; v1(61.595,57.302) 59.487,55.194 ; 60.945,56.652 cw(c61.595,56.002) 61.595,56.921 ccw(c61.595,56.002) 60.945,56.652 ; 60.945,56.652 ccw(c60.294,57.302) 61.214,57.302 cw(c60.294,57.302) 60.945,56.652 ; 56.714,56.104 ccw(c56.279,56.54) 56.894,56.54 cw(c56.279,56.54) 56.714,56.104
  Bottom Layer w0.254: v1(61.595,57.302) L2.1@61.595,57.345
BOOT0: R40.1 U1.138 | length 19.4
  Top Layer w0.254: v1(34.417,41.377) 35.255,41.377 ; U1.138@43.423,46.566 36.914,46.566 36.093,45.745 36.093,42.215 35.255,41.377 ; 35.255,41.377 cw(c35.255,42.108) 34.704,41.627 ccw(c35.255,42.108) 35.255,41.377 ; 35.255,41.377 ccw(c35.255,40.645) 34.704,41.126 cw(c35.255,40.645) 35.255,41.377
  Bottom Layer w0.254: R40.1@33.69,41.445 v1@34.349,41.445 ; v1(34.417,41.377) v1@34.349,41.445 ; R40.1@33.69,41.445 cw(c33.69,41.012) 34.076,41.206 ccw(c33.69,41.012) R40.1@33.69,41.445 ; R40.1@33.69,41.445 ccw(c33.69,42.065) 34.14,41.638 cw(c33.69,42.065) R40.1@33.69,41.445 ; v1@34.349,41.445 cw(c34.349,41.618) 34.181,41.574 ccw(c34.349,41.618) v1@34.349,41.445 ; v1@34.349,41.445 ccw(c34.349,41.271) 34.181,41.315 cw(c34.349,41.271) v1@34.349,41.445
BOOT1: R42.1 U1.48 | length 14.3
  Top Layer w0.254: U1.48@21.423,44.066 29.899,44.066 30.734,43.231 v1(30.734,41.427) ; 30.734,42.347 cw(c29.814,42.347) 30.465,41.697 ccw(c29.814,42.347) 30.734,42.347 ; 30.734,42.347 ccw(c31.654,42.347) 31.003,41.697 cw(c31.654,42.347) 30.734,42.347
DC24V_CK1_CPU: U1.118
DC24V_CK2_CPU: U1.117
DC110V: D3.A J4.2 R98.2 | length 159.2
  Top Layer w1.016: v4@40.64,1.88 v4@40.869,1.88 ; v4(40.869,1.93) 42.748,1.93 ; 42.432,1.93 ccw(c42.432,3.364) v4@43.446,2.35 ; v4@43.078,2.261 42.748,1.93 ; v4@43.425,2.324 cw(c42.748,2.71) 42.748,1.93 ; v4@43.504,2.138 ccw(c43.308,1.371) 42.748,1.93 ; v4(43.536,2.261) 43.536,3.708 46.914,7.087 v4(61.214,7.087) v4@62.789,7.087
  Top Layer w1.27: D3.A@79.42,18.57 ccw(c80.424,18.594) 80.424,17.589 ; 80.035,17.589 81.725,17.589 ; 80.289,14.861 cw(c81.875,14.861) 80.754,15.982 ; D3.A@80.372,18.91 81.07,19.609 82.055,19.609 ; 80.435,15.766 cw(c81.083,14.256) 82.245,15.418 ; D3.A@80.511,19.376 ccw(c81.125,20.538) 82.055,19.609 ; D3.A@80.597,19.004 cw(c82.055,17.55) 82.055,19.609 ; D3.A@80.628,18.78 ccw(c82.969,20.486) 82.969,17.589 ; D3.A@80.677,18.506 ccw(c82.74,17.918) 81.224,16.401 ; 80.689,15.923 cw(c81.782,14.624) 82.982,15.824 ; 80.754,16.871 cw(c82.488,15.137) 82.488,17.589 cw(c82.488,20.042) D3.A@80.754,18.308 ; D3.A@81.002,18.167 cw(c82.982,17.529) 82.982,19.609 ; 81.834,15.829 cw(c84.599,18.593) D3.A@80.689,18.593 ; 82.245,10.135 82.245,15.418 ; 80.289,11.074 81.224,10.14 ; 80.289,11.074 80.289,17.335 ; 80.289,11.074 80.289,9.474 81.224,8.54 ; 80.289,17.335 81.224,16.401 ; 80.289,17.335 80.328,17.335 ; 80.328,17.335 81.471,17.335 ; 80.328,17.335 82.245,15.418 ; D3.A@80.689,18.593 ccw(c81.839,18.593) 81.026,17.78 cw(c81.839,18.593) D3.A@80.689,18.593 ; 81.224,8.54 81.224,10.14 ; 81.224,8.54 82.824,8.54 ; 81.224,10.14 82.824,8.54 ; 81.224,10.14 81.224,16.401 ; 81.471,17.335 81.725,17.589 ; 81.471,17.335 82.982,15.824 ; 81.725,17.589 cw(c81.725,18.625) 80.689,18.6 ccw(c81.725,18.625) 81.725,17.589 ; 81.725,17.589 ccw(c81.725,16.693) 80.933,17.113 cw(c81.725,16.693) 81.725,17.589 ; 81.725,17.589 cw(c81.725,18.486) 80.933,18.066 ccw(c81.725,18.486) 81.725,17.589 ; 81.725,17.589 82.969,17.589 ; 81.725,17.589 82.055,17.92 82.055,19.609 ; 82.055,19.609 82.982,19.609 ; 82.055,19.609 83.884,17.78 84,17.78 ; 82.824,8.54 J4.2@84,8.54 ; 82.969,17.589 84,16.559 ; 82.982,15.824 82.982,9.558 J4.2@84,8.54 ; 82.982,19.609 84,18.591 84,17.78 ; J4.2@84,8.54 84,16.559 ; 84,16.559 84,17.78 ; 80.289,17.627 cw(c81.338,17.627) 80.596,18.368 ccw(c81.338,17.627) 80.289,17.627 ; 81.775,9.589 ccw(c84,11.813) 84,8.667 cw(c84,11.813) 81.775,9.589
  Bottom Layer w1.016: v4(61.214,7.087) 78.486,7.087 79.939,8.54 J4.2@84,8.54
  other v2: 7.874,69.545 5.512,69.647
  other v4: 62.535,7.112
DC110VGND: C59.2 C60.1 J4.1 U10.2 | length 350.9
  Top Layer w1.27: 66.881,9.627 cw(c69.025,9.052) U10.2@68.58,11.227 ; 66.98,9.528 ccw(c66.405,11.672) U10.2@68.58,11.227 ; U10.2@67.36,10.875 cw(c64.599,10.078) 67.087,8.642 cw(c69.576,7.205) U10.2@68.885,9.994 ; U10.2@67.498,10.562 cw(c64.516,8.732) 67.546,6.983 ; 68.097,6.934 68.58,6.934 ; 68.612,8.829 ccw(c66.583,10.001) U10.2@68.58,11.227 ; 70.075,9.556 cw(c70.605,11.534) U10.2@68.58,11.227 ; 70.307,9.521 ccw(c67.988,8.9) U10.2@68.58,11.227 ; 66.345,8.992 66.345,12.04 66.751,12.446 ; 66.345,8.992 66.891,9.538 ; 66.345,8.992 66.345,3.734 67.945,2.134 82.398,2.134 84,3.736 J4.1@84,6 79.482,6 ; 66.412,9.059 cw(c68.58,6.891) U10.2@68.58,9.957 ; 66.412,9.059 ccw(c64.244,11.227) 67.31,11.227 cw(c64.244,11.227) 66.412,9.059 ; 66.412,9.059 cw(c68.58,6.891) U10.2@68.58,9.957 ; 66.751,12.446 66.827,12.522 U10.2@69.875,12.522 ; 66.751,12.446 67.361,12.446 U10.2@68.58,11.227 ; 66.891,9.538 cw(c68.03,8.398) U10.2@68.338,9.98 ; 66.891,9.538 ccw(c65.752,10.677) U10.2@67.333,10.985 ; 66.891,9.538 cw(c68.03,8.398) U10.2@68.338,9.98 ; 66.891,9.538 ccw(c65.752,10.677) U10.2@67.333,10.985 ; 66.891,9.538 ccw(c65.752,10.677) U10.2@67.333,10.985 ; 66.891,9.538 cw(c68.03,8.398) U10.2@68.338,9.98 ; 66.891,9.538 ccw(c65.752,10.677) U10.2@67.333,10.985 ; 66.891,9.538 cw(c68.03,8.398) U10.2@68.338,9.98 ; 66.891,9.538 U10.2@68.58,11.227 ; 66.891,9.538 66.891,4.255 67.945,3.2 82.347,3.2 83.236,4.089 83.236,5.797 82.367,4.928 81.991,4.928 ; 68.58,6.934 68.834,6.934 ; 68.58,6.934 68.58,7.493 ; 68.58,6.934 68.58,5.131 69.113,4.597 74.625,4.597 74.955,4.928 ; 68.58,7.493 68.834,7.239 ; 68.58,7.493 68.326,7.747 68.58,7.747 ; 68.58,7.493 68.58,7.747 ; 68.58,7.747 68.834,7.747 ; 68.58,7.747 68.58,8.636 70.155,10.211 70.917,10.211 ; U10.2@68.58,9.957 cw(c68.58,7.32) 70.445,9.184 ccw(c68.58,7.32) U10.2@68.58,9.957 ; U10.2@68.58,11.227 cw(c69.991,11.106) 69.991,12.522 ccw(c69.991,11.106) U10.2@68.58,11.227 ; U10.2@68.58,11.227 ccw(c72.658,7.149) 66.891,7.149 cw(c72.658,7.149) U10.2@68.58,11.227 ; U10.2@68.58,11.227 U10.2@69.875,12.522 ; 68.834,6.934 68.986,6.934 ; 68.834,6.934 68.834,7.239 ; 68.834,6.934 68.834,5.055 72.492,5.055 72.492,6.706 ; 68.834,7.239 68.986,7.087 ; 68.834,7.239 68.834,7.747 ; 68.834,7.747 69.317,7.747 ; 68.834,7.747 68.834,8.052 70.206,9.423 ; 68.986,6.934 69.139,6.934 ; 68.986,6.934 68.986,7.087 ; 68.986,6.934 68.986,6.223 69.672,5.537 71.907,5.537 71.907,6.858 ; 68.986,7.087 69.139,6.934 ; 68.986,7.087 68.986,7.417 69.317,7.747 ; 69.139,6.934 70.993,6.934 ; 69.139,6.934 70.053,6.02 70.993,6.02 70.993,6.934 ; 69.317,7.747 70.993,7.747 ; 69.317,7.747 70.333,8.763 70.993,8.103 70.993,7.747 ; U10.2@69.478,10.329 ccw(c73.118,6.689) 67.97,6.689 cw(c73.118,6.689) U10.2@69.478,10.329 ; U10.2@69.478,10.329 ccw(c75.724,4.083) 66.891,4.083 cw(c75.724,4.083) U10.2@69.478,10.329 ; U10.2@69.875,12.522 71.374,12.522 ; U10.2@69.875,12.522 69.875,12.344 71.145,11.074 ; 70.206,9.423 cw(c71.29,10.508) 69.808,10.901 ccw(c71.29,10.508) 70.206,9.423 ; 70.206,9.423 ccw(c68.883,8.101) 68.702,9.963 cw(c68.883,8.101) 70.206,9.423 ; 70.206,9.423 71.831,7.798 ; 70.917,10.211 cw(c70.917,11.278) 69.85,11.255 ccw(c70.917,11.278) 70.917,10.211 ; 70.917,10.211 71.831,9.296 ; 70.993,6.934 70.993,7.747 ; 70.993,6.934 71.374,6.934 71.603,6.706 71.755,6.858 71.907,6.858 ; 70.993,7.747 71.577,7.747 71.831,7.493 ; 71.145,11.074 cw(c71.145,12.829) 69.657,11.9 ccw(c71.145,12.829) 71.145,11.074 ; 71.145,11.074 ccw(c71.145,8.841) 69.51,10.362 cw(c71.145,8.841) 71.145,11.074 ; 71.145,11.074 72.822,11.074 ; 71.145,11.074 70.104,11.074 67.97,8.941 67.97,4.674 68.961,3.683 78.334,3.683 78.765,4.115 82.804,4.115 81.991,4.928 ; 71.145,11.074 71.984,10.236 ; 71.374,12.522 ccw(c71.374,10.988) 69.845,11.119 cw(c71.374,10.988) 71.374,12.522 ; 71.374,12.522 72.822,11.074 ; 71.831,7.493 71.831,7.798 ; 71.831,7.493 71.831,7.366 71.907,7.29 ; 71.831,7.493 71.907,7.417 ; 71.831,7.798 71.831,9.296 ; 71.831,7.798 71.907,7.722 71.907,7.417 ; 71.831,9.296 71.831,10.084 71.984,10.236 ; 71.831,9.296 72.492,8.636 72.492,6.706 ; 71.907,6.858 72.06,6.858 72.2,6.998 ; 71.907,6.858 71.907,7.29 ; 71.907,7.29 72.2,6.998 ; 71.907,7.29 71.907,7.417 ; 71.907,7.417 72.263,7.061 72.2,6.998 ; 71.984,10.236 72.822,11.074 ; 71.984,10.236 72.822,9.398 ; 72.2,6.998 72.492,6.706 ; 72.492,6.706 74.27,4.928 74.955,4.928 ; 72.822,8.661 72.822,9.398 ; 72.822,8.661 72.822,7.671 75.286,5.207 ; 72.822,8.661 75.483,6 ; 72.822,9.398 72.822,11.074 ; 74.955,4.928 81.991,4.928 ; 74.955,4.928 75.235,5.207 75.286,5.207 ; 75.286,5.207 78.689,5.207 ; 75.286,5.207 75.463,5.029 C59.2@77.191,5.029 78.511,5.029 78.689,5.207 ; 75.483,6 cw(c75.483,4.25) 77.075,4.976 ccw(c75.483,4.25) 75.483,6 ; 75.483,6 79.482,6 ; 78.689,5.207 cw(c77.936,5.961) 77.27,5.128 ccw(c77.936,5.961) 78.689,5.207 ; 78.689,5.207 79.482,6 ; 78.689,5.207 81.712,5.207 81.991,4.928 ; 67.97,8.861 cw(c69.129,8.861) 68.867,9.99 ccw(c69.129,8.861) 67.97,8.861 ; U10.2@69.85,11.227 ccw(c73.345,11.227) 70.874,8.755 cw(c73.345,11.227) U10.2@69.85,11.227 ; 73.634,3.683 ccw(c73.634,8.586) 77.101,5.119 cw(c73.634,8.586) 73.634,3.683 ; C59.2@77.29,4.95 cw(c79.482,3.187) 79.482,6 ccw(c79.482,3.187) C59.2@77.29,4.95 ; 82.826,5.387 cw(c84,4.212) 84,5.873 ccw(c84,4.212) 82.826,5.387 ; 83.236,3.942 cw(c85.93,3.942) 84.087,5.907 ccw(c85.93,3.942) 83.236,3.942
  Bottom Layer w1.27: U10.2@68.58,11.227 67.711,12.095 C60.1@64.745,12.095 ; C60.1@64.745,12.095 cw(c64.745,8.857) 67.5,10.559 ccw(c64.745,8.857) C60.1@64.745,12.095